# Altium PCB Main.PcbDoc
Units mil, origin at the board's own origin, x right, y up, seen from the top; angles counter-clockwise.
Board outline 6755.91 x 4448.82 mil, 2 copper layers (Top Layer, Bottom Layer); 132 components, 92 nets, 548 pads, 40 vias.
Unrouted connection lines stored in the file: 23.
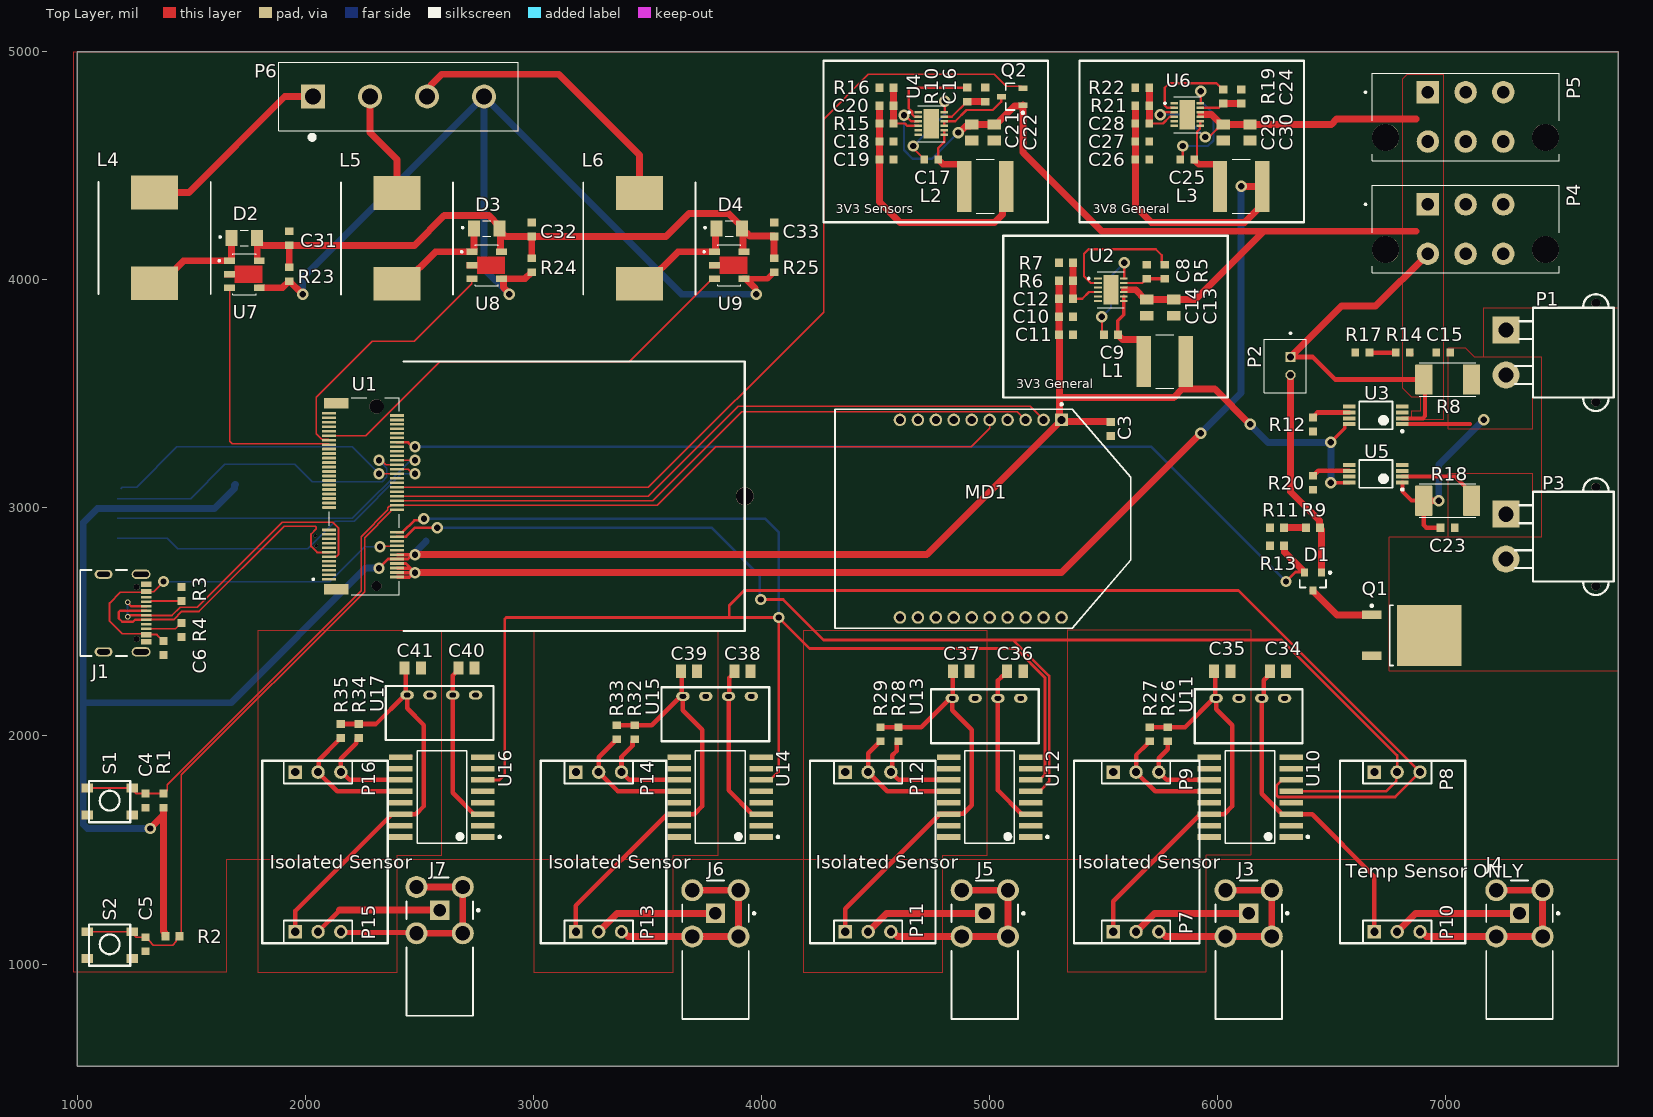
[diagram p0: Top Layer view]
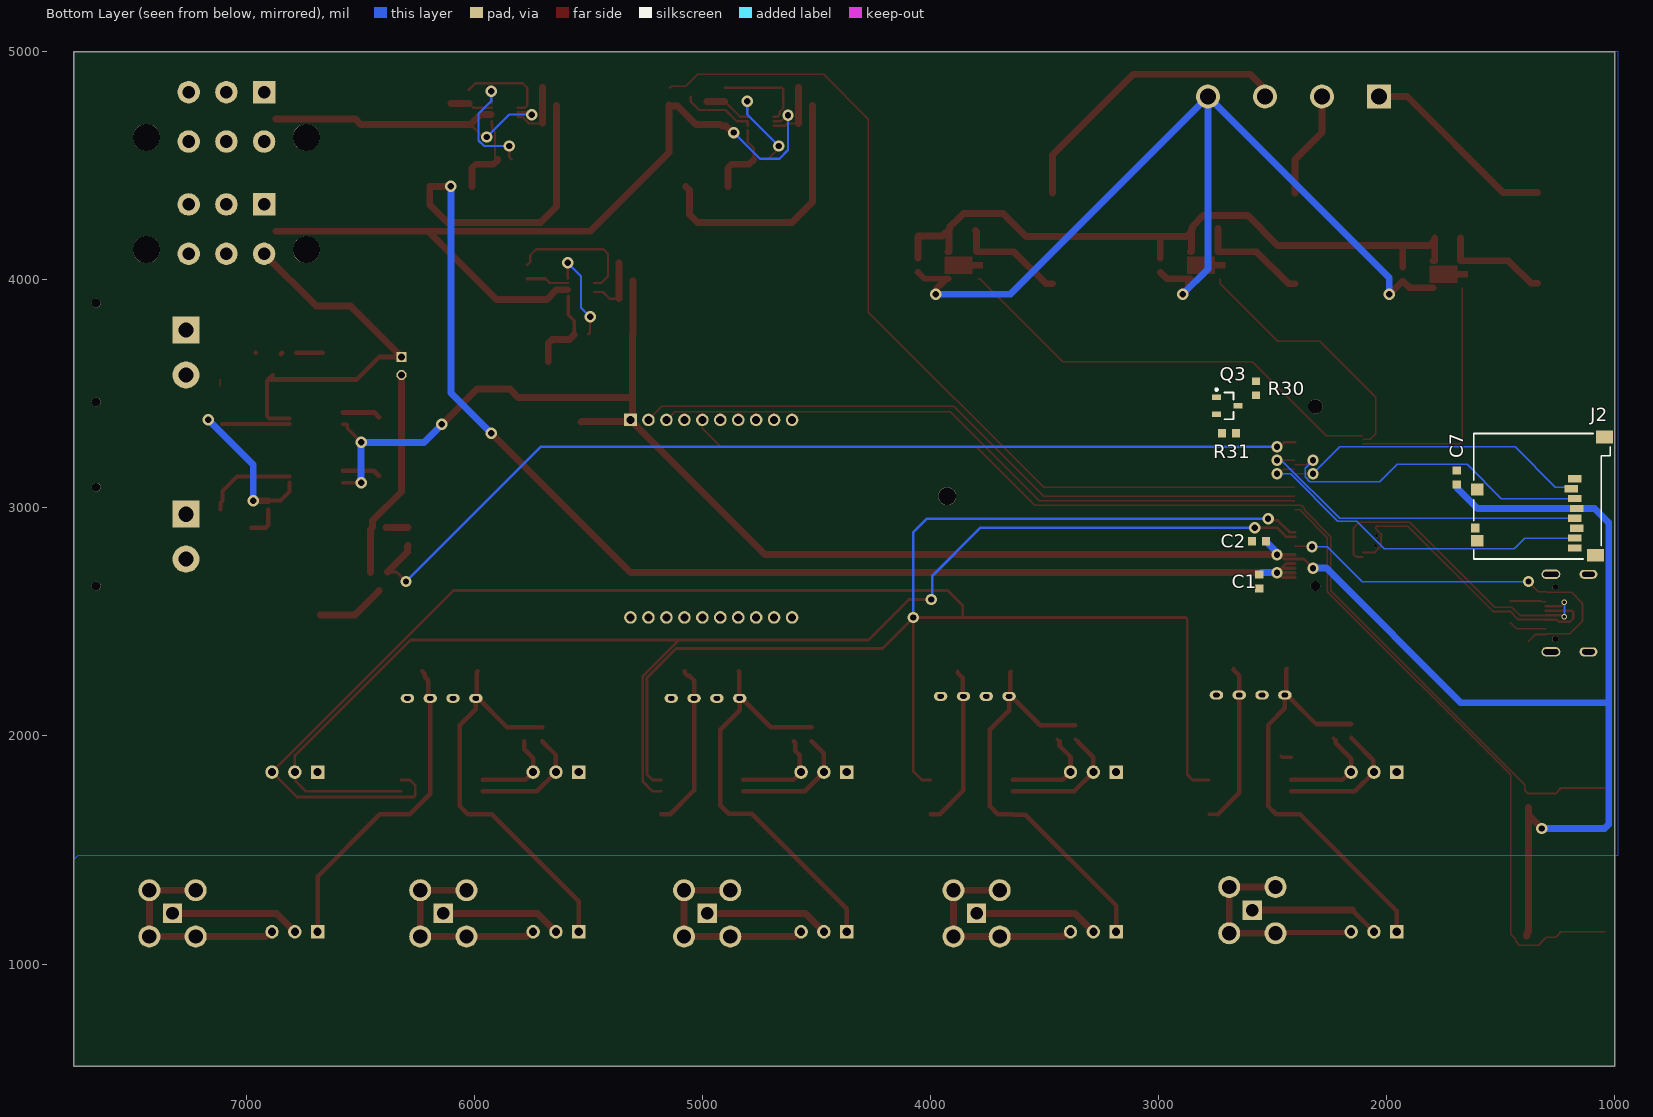
[diagram p1: Bottom Layer view, seen from below]

## Layer stack, top to bottom
Top Solder: solder mask 0.4, Solder Resist, Dk 3.5
Top Layer: signal copper 1.4
Dielectric 1: dielectric 12.6, FR-4, Dk 4.8
Bottom Layer: signal copper 1.4
Bottom Solder: solder mask 0.4, Solder Resist, Dk 3.5

## Board outline
1000,551.18 7755.91,551.18 7755.91,5000 1000,5000

## Design rules (kind name [scope] priority, off if disabled: settings)
Clearance "Clearance, Clarence" [All] p1: gap=6 ignorepadtopadclearanceinfootprint=TRUE except(20: Fill-Fill Fill-Poly Fill-Region Poly-Poly Poly-Region Region-Region)
Clearance [All] p2: gap=10 ignorepadtopadclearanceinfootprint=FALSE except(0: Arc-Hole Track-Hole SMDPad-Hole THPad-Hole Via-Hole Fill-Hole Poly-Hole Region-Hole Text-Hole)
DiffPairsRouting [All] p1: maxlimit=10 minlimit=10 mostfreqgap=10 toplayer_minwidth=6 toplayer_maxwidth=15 toplayer_prefwidth=15 bottomlayer_minwidth=6 bottomlayer_maxwidth=15 bottomlayer_prefwidth=15 maxuncoupledlength=500
PlaneClearance [All] p1: clearance=30
PolygonConnect "GND Copper" [InNet('GND')] p1: thpad.connectstyle=Relief thpad.reliefconductorwidth=10 thpad.reliefentries=4 thpad.polygonreliefangle="45 Angle" thpad.airgapwidth=6 smdpad.connectstyle=Direct smdpad.reliefconductorwidth=10 smdpad.reliefentries=4 smdpad.polygonreliefangle="45 Angle" smdpad.airgapwidth=6 via.connectstyle=Relief via.reliefconductorwidth=10 via.reliefentries=4 via.polygonreliefangle="45 Angle" via.airgapwidth=6
PolygonConnect [All] p2: connectstyle=Relief reliefconductorwidth=20 reliefentries=4 polygonreliefangle="45 Angle" airgapwidth=6
RoomDefinition LEDs [InComponentClass('LEDs')] p1: confinementstyle=ConfineIn formatcopy=TRUE lockcomponents=FALSE outline 4251.97,4973.23 1023.62,4973.23 1023.62,3763.54 4251.97,3763.54
RoomDefinition UserInputs [InComponentClass('UserInputs')] p2: confinementstyle=ConfineIn formatcopy=TRUE lockcomponents=FALSE outline 996.18,3488.19 996.18,968.5 1756.18,968.5 1756.18,3488.19
RoutingVias [All] p1: holewidth=28 width=50 viastyle="Through Hole" minholewidth=28 minwidth=50 maxholewidth=28 maxwidth=50
SolderMaskExpansion [All] p1: expansion=4 istentingtop=FALSE
Width [All] p1: maxlimit=30 minlimit=6 preferedwidth=15 minimp=50.000000 maximp=50.000000 favimp=50.000000
Width Width_1 [All] p2: maxlimit=10 minlimit=10 preferedwidth=10
28 further rules are at their usual default settings.

## Classes and differential pairs
component class Sensors: C34 C35 C36 C37 C38 C39 C40 C41 J3 J4 J5 J6 J7 P7 P8 P9 P10 P11 P12 P13 P14 P15 P16 Q3 R26 R27 R28 R29 R30 R31 R32 R33 R34 R35 U10 U11 U12 U13 U14 U15 U16 U17
component class UserInputs: C4 C5 C6 C7 J1 J2 R1 R2 R3 R4 S1 S2
component class Power: C8 C9 C10 C11 C12 C13 C14 C15 C16 C17 C18 C19 C20 C21 C22 C23 C24 C25 C26 C27 C28 C29 C30 D1 L1 L2 L3 P1 P2 P3 P4 P5 Q1 Q2 R5 R6 R7 R8 R9 R10 R11 R12 R13 R14 R15 R16 R17 R18 R19 R20 R21 R22 U2 U3 U4 U5 U6
component class MainPCB: C1 C2 C3 MD1 U1
component class LEDs: C31 C32 C33 D2 D3 D4 L4 L5 L6 P6 R23 R24 R25 U7 U8 U9
differential pair MCU_USB_D: +MCU_USB_D_P -MCU_USB_D_N

## Components (designator, comment, footprint, x,y, rotation, side; value= is the part's Value field where it differs from the comment)
C1 "Capacitor" ANTC1608X90N 2559.06,2677.17 r90 bottom value="1uF, 6.3V"
C2 "Capacitor" ANTC1608X90N 2559.06,2854.33 r180 bottom value="1uF, 6.3V"
C3 "Capacitor" ANTC1608X90N 5531.5,3346.46 r90 top value="1uF, 6.3V"
C4 "Capacitor" ANTC1608X90N 1299.21,1716.54 r90 top value="0.1uF, 6V"
C5 "Capacitor" ANTC1608X90N 1299.21,1086.61 r90 top value="0.1uF, 6V"
C6 "Capacitor" ANTC1608X90N 1377.95,2385.83 r90 top value="1uF, 6.3V"
C7 "Capacitor" ANTC1608X90N 1692.91,3133.86 r270 bottom value="1uF, 6.3V"
C8 "Capacitor" ANTC1608X90N 5688.98,4035.43 r270 top value="1uF, 6.3V"
C9 "Capacitor" ANTC1608X90N 5531.5,3759.84 r180 top value="0.1uF, 6V"
C10 "Capacitor" ANTC1608X90N 5334.65,3838.58 r180 top value="47uF, 6.3V"
C11 "Capacitor" ANTC1608X90N 5334.65,3759.84 r180 top value="22uF, 6.3V"
C12 "Capacitor" ANTC1608X90N 5334.65,3917.32 r0 top value="4.7pF, 6.3V"
C13 "Capacitor" CAPC2012X145N 5807.09,3877.95 r90 top value="10uF, 50V"
C14 "Capacitor" CAPC2012X145N 5688.98,3877.95 r90 top value="10uF, 50V"
C15 "Capacitor" ANTC1608X90N 6988.19,3681.1 r180 top value="0.1uF, 6V"
C16 "Capacitor" ANTC1608X90N 4980.31,4811.81 r270 top value="1uF, 6.3V"
C17 "Capacitor" ANTC1608X90N 4744.09,4527.56 r180 top value="0.1uF, 6V"
C18 "Capacitor" ANTC1608X90N 4547.24,4606.3 r180 top value="47uF, 6.3V"
C19 "Capacitor" ANTC1608X90N 4547.24,4527.56 r180 top value="22uF, 6.3V"
C20 "Capacitor" ANTC1608X90N 4547.24,4763.78 r0 top value="4.7pF, 6.3V"
C21 "Capacitor" CAPC2012X145N 4921.26,4645.67 r90 top value="10uF, 50V"
C22 "Capacitor" CAPC2012X145N 5019.69,4645.67 r90 top value="10uF, 50V"
C23 "Capacitor" ANTC1608X90N 7007.87,2913.39 r0 top value="0.1uF, 6V"
C24 "Capacitor" ANTC1608X90N 6102.36,4803.15 r270 top value="1uF, 6.3V"
C25 "Capacitor" ANTC1608X90N 5866.14,4527.56 r180 top value="0.1uF, 6V"
C26 "Capacitor" ANTC1608X90N 5669.29,4527.56 r180 top value="47uF, 6.3V"
C27 "Capacitor" ANTC1608X90N 5669.29,4606.3 r180 top value="22uF, 6.3V"
C28 "Capacitor" ANTC1608X90N 5669.29,4685.04 r0 top value="4.7pF, 6.3V"
C29 "Capacitor" CAPC2012X145N 6023.62,4645.67 r90 top value="10uF, 50V"
C30 "Capacitor" CAPC2012X145N 6141.74,4645.67 r90 top value="10uF, 50V"
C31 "Capacitor" ANTC1608X90N 1929.13,4181.89 r270 top value="4.7uF, 25V"
C32 "Capacitor" ANTC1608X90N 2992.13,4221.26 r270 top value="4.7uF, 25V"
C33 "Capacitor" ANTC1608X90N 4055.12,4221.26 r270 top value="4.7uF, 25V"
C34 "Capacitor" CAPC2012X145N 6263.78,2283.46 r0 top value="10uF, 50V"
C35 "Capacitor" CAPC2012X145N 6019.69,2283.46 r180 top value="10uF, 50V"
C36 "Capacitor" CAPC2012X145N 5111.81,2283.46 r0 top value="10uF, 50V"
C37 "Capacitor" CAPC2012X145N 4875.59,2283.46 r180 top value="10uF, 50V"
C38 "Capacitor" CAPC2012X145N 3915.75,2283.46 r0 top value="10uF, 50V"
C39 "Capacitor" CAPC2012X145N 3681.1,2283.46 r180 top value="10uF, 50V"
C40 "Capacitor" CAPC2012X145N 2706.57,2297.52 r0 top value="10uF, 50V"
C41 "Capacitor" CAPC2012X145N 2470.35,2297.52 r180 top value="10uF, 50V"
D1 "BAV23CLT1G" ONSC-SOT-23-3-318-08_V 6417.32,2677.17 r270 top
D2 ">2A peak, >400mA cont." DIO_SS26FL 1732.28,4183.86 r0 top
D3 ">2A peak, >400mA cont." DIO_SS26FL 2795.28,4225.2 r0 top
D4 ">2A peak, >400mA cont." DIO_SS26FL 3858.27,4225.2 r0 top
J1 "USB4105-GF-A" GCT_USB4105-GF-A 1114.96,2538.98 r270 top
J2 "uSD  SPI Mode" GCT_MEM2051-00-195-00-A 1318.9,3051.18 r90 bottom
J3 "PCB.SMAFRA.HT" FP-PCB_SMAFRA_HT-MFG 6135.43,1062.99 r180 top
J4 "PCB.SMAFRA.HT" FP-PCB_SMAFRA_HT-MFG 7322.83,1062.99 r180 top
J5 "PCB.SMAFRA.HT" FP-PCB_SMAFRA_HT-MFG 4978.74,1062.99 r180 top
J6 "PCB.SMAFRA.HT" FP-PCB_SMAFRA_HT-MFG 3797.64,1062.99 r180 top
J7 "PCB.SMAFRA.HT" FP-PCB_SMAFRA_HT-MFG 2588.46,1077.05 r180 top
L1 "Inductor" IND_NR6028T4R7M 5767.72,3641.73 r0 top value="4.7uH, >3A"
L2 "Inductor" IND_NR6028T4R7M 4980.31,4409.45 r0 top value="4.7uH, >3A"
L3 "Inductor" IND_NR6028T4R7M 6102.36,4409.45 r0 top value="4.7uH, >3A"
L4 "Inductor" INDPM125125X800N 1338.58,4183.86 r90 top value="100uH, >2A"
L5 "Inductor" INDPM125125X800N 2401.57,4181.89 r90 top value="100uH, >2A"
L6 "Inductor" INDPM125125X800N 3464.57,4181.89 r90 top value="100uH, >2A"
MD1 "XBP9B-DMUTB002" FP-XBP9B-DMUTB002-MFG 4970.47,2952.76 r270 top
P1 "Board Pwr, XT30" XT30_Horizontal 7559.06,3681.1 r270 top
P2 "Pwr Button" TE_6-440054-2 6318.9,3661.69 r270 top
P3 "Solar Panel Converter" XT30_Horizontal 7559.06,2874.02 r270 top
P4 "Motor 1" TE_1586039-6 6921.26,4330.71 r0 top
P5 "Motor 2" TE_1586039-6 6921.26,4822.83 r0 top
P6 "LED Header" TE_350761-4 2033.46,4803.15 r90 top
P7 "Sensor Probe Side" HDR1X3 5541.73,1141.73 r0 top
P8 "Sensor MCU Side" HDR1X3 6686.61,1841.73 r0 top
P9 "Sensor MCU Side" HDR1X3 5541.73,1841.73 r0 top
P10 "Sensor Probe Side" HDR1X3 6686.61,1141.73 r0 top
P11 "Sensor Probe Side" HDR1X3 4366.93,1141.73 r0 top
P12 "Sensor MCU Side" HDR1X3 4366.93,1841.73 r0 top
P13 "Sensor Probe Side" HDR1X3 3185.83,1141.73 r0 top
P14 "Sensor MCU Side" HDR1X3 3185.83,1841.73 r0 top
P15 "Sensor Probe Side" HDR1X3 1955.39,1141.73 r0 top
P16 "Sensor MCU Side" HDR1X3 1955.39,1841.73 r0 top
Q1 "FDD6670A" DPAK 6850.39,2440.94 r0 top
Q2 "YJL3400A" SOT23-3 5098.43,4803.15 r180 top
Q3 "YJL3400A" SOT23-3 2698.43,3447.47 r180 bottom
R1 "Resistor" ANTC1608X90N 1377.95,1716.54 r270 top value=1k
R2 "Resistor" ANTC1608X90N 1417.32,1122.05 r180 top value=1k
R3 "Resistor" ANTC1608X90N 1456.69,2622.05 r270 top value=5.1k
R4 "Resistor" ANTC1608X90N 1456.69,2464.57 r90 top value=5.1k
R5 "Resistor" ANTC1608X90N 5767.72,4035.43 r270 top value=50k
R6 "Resistor" ANTC1608X90N 5334.65,3996.06 r0 top value=301k
R7 "Resistor" ANTC1608X90N 5334.65,4074.8 r0 top value=96.3k
R8 "Resistor" RESC6331X70N 7007.87,3562.99 r180 top value=1m
R9 "Resistor" ANTC1608X90N 6417.32,2913.39 r0 top value=100k
R10 "Resistor" ANTC1608X90N 4901.58,4811.81 r270 top value=50k
R11 "Resistor" ANTC1608X90N 6259.84,2913.39 r0 top value=20k
R12 "Resistor" ANTC1608X90N 6417.32,3366.14 r90 top value=100k
R13 "Resistor" ANTC1608X90N 6259.84,2834.65 r0 top value=10k
R14 "Resistor" ANTC1608X90N 6811.02,3681.1 r0 top value=100k
R15 "Resistor" ANTC1608X90N 4547.24,4685.04 r0 top value=301k
R16 "Resistor" ANTC1608X90N 4547.24,4842.52 r0 top value=96.3k
R17 "Resistor" ANTC1608X90N 6633.86,3681.1 r0 top value=20k
R18 "Resistor" RESC6331X70N 7007.87,3031.5 r180 top value=10m
R19 "Resistor" ANTC1608X90N 6023.62,4803.15 r270 top value=50k
R20 "Resistor" ANTC1608X90N 6417.32,3110.24 r90 top value=20k
R21 "Resistor" ANTC1608X90N 5669.29,4763.78 r0 top value=301k
R22 "Resistor" ANTC1608X90N 5669.29,4842.52 r0 top value=80.3k
R23 "Resistor" ANTC1608X90N 1929.13,4024.41 r270 top value="30m, >0.1W"
R24 "Resistor" ANTC1608X90N 2992.13,4063.78 r270 top value="30m, >0.1W"
R25 "Resistor" ANTC1608X90N 4055.12,4063.78 r270 top value="30m, >0.1W"
R26 "Resistor" ANTC1608X90N 5781.1,2007.87 r90 top value=10k
R27 "Resistor" ANTC1608X90N 5702.36,2007.87 r90 top value=10k
R28 "Resistor" ANTC1608X90N 4600,2007.87 r90 top value=10k
R29 "Resistor" ANTC1608X90N 4521.26,2007.87 r90 top value=10k
R30 "Resistor" ANTC1608X90N 2572.44,3524.24 r90 bottom value=200k
R31 "Resistor" ANTC1608X90N 2690.55,3327.39 r0 bottom value=200k
R32 "Resistor" ANTC1608X90N 3443.31,2016.54 r90 top value=10k
R33 "Resistor" ANTC1608X90N 3364.57,2016.54 r90 top value=10k
R34 "Resistor" ANTC1608X90N 2234.13,2021.93 r90 top value=10k
R35 "Resistor" ANTC1608X90N 2155.39,2021.93 r90 top value=10k
S1 "Switch Normally Opened" TL3313AF250QG 1141.73,1716.54 r180 top
S2 "Switch Normally Opened" TL3313AF250QG 1141.73,1086.61 r180 top
U1 "B402" "B402 Full" 2312.01,3051.18 r90 top
U2 "ISL85003AFRZ" SON50P300X300X100-13N(270X200) 5531.5,3956.69 r0 top
U3 "INA139" INA139-Q1 6692.91,3405.51 r180 top
U4 "ISL85003AFRZ" SON50P300X300X100-13N(270X200) 4744.09,4685.04 r0 top
U5 "INA139" INA139-Q1 6692.91,3149.61 r180 top
U6 "ISL85003AFRZ" SON50P300X300X100-13N(270X200) 5866.14,4724.41 r0 top
U7 "AL8861Y-13" CONV_AL8861Y-13 1732.28,4024.41 r0 top
U8 "AL8861Y-13" CONV_AL8861Y-13 2795.28,4063.78 r0 top
U9 "AL8861Y-13" CONV_AL8861Y-13 3858.27,4063.78 r0 top
U10 "ISO1640QDWRQ1" DW0016A-IPC_A 6141.73,1732.28 r180 top
U11 "B0303S-1WR3" B0303S-1WR3 6135.43,2086.61 r180 top
U12 "ISO1640QDWRQ1" DW0016A-IPC_A 5000,1732.28 r180 top
U13 "B0303S-1WR3" B0303S-1WR3 4978.74,2086.61 r180 top
U14 "ISO1640QDWRQ1" DW0016A-IPC_A 3818.9,1732.28 r180 top
U15 "B0303S-1WR3" B0303S-1WR3 3797.64,2095.28 r180 top
U16 "ISO1640QDWRQ1" DW0016A-IPC_A 2598.43,1732.28 r180 top
U17 "B0303S-1WR3" B0303S-1WR3 2588.46,2100.67 r180 top

## Footprints (in the part's own frame and the unit in brackets; to place one, negate y for a bottom-side part, rotate by r counter-clockwise, add the part's x,y. Pads: shape width x height; smd on the part's side, far side on the other; paste and mask are expansions set on the pad)
ANTC1608X90N [mm]
  rect 0.87x0.93 smd: 1(-0.78,0) 2(0.78,0)
B0303S-1WR3 [mm]
  oval 1.5x1 hole 0.5 slot 0.7 at 0 deg: 1(-4,-2) 2(-1.46,-2) 3(1.08,-2) 4(3.62,-2)
  silkscreen extent -6,-3 6,3
"B402 Full" [mm]
  rrect15% 0.3x1.55 smd: 1(-9.25,5.275) 2(-9,-2.275) 3(-8.75,5.275) 4(-8.5,-2.275) 5(-8.25,5.275) 6(-8,-2.275) 7(-7.75,5.275) 8(-7.5,-2.275) 9(-7.25,5.275) 10(-7,-2.275) 11(-6.75,5.275) 12(-6.5,-2.275) 13(-6.25,5.275) 14(-6,-2.275) 15(-5.75,5.275) 16(-5.5,-2.275) 17(-5.25,5.275) 18(-5,-2.275) 19(-4.75,5.275) 20(-4.5,-2.275) 21(-4.25,5.275) 22(-4,-2.275) 23(-3.75,5.275) 32(-1.5,-2.275) 33(-1.25,5.275) 34(-1,-2.275) 35(-0.75,5.275) 36(-0.5,-2.275) 37(-0.25,5.275) 38(0,-2.275) 39(0.25,5.275) 40(0.5,-2.275) 41(0.75,5.275) 42(1,-2.275) 43(1.25,5.275) 44(1.5,-2.275) 45(1.75,5.275) 46(2,-2.275) 47(2.25,5.275) 48(2.5,-2.275) 49(2.75,5.275) 50(3,-2.275) 51(3.25,5.275) 52(3.5,-2.275) 53(3.75,5.275) 54(4,-2.275) 55(4.25,5.275) 56(4.5,-2.275) 57(4.75,5.275) 58(5,-2.275) 59(5.25,5.275) 60(5.5,-2.275) 61(5.75,5.275) 62(6,-2.275) 63(6.25,5.275) 64(6.5,-2.275) 65(6.75,5.275) 66(7,-2.275) 67(7.25,5.275) 68(7.5,-2.275) 69(7.75,5.275) 70(8,-2.275) 71(8.25,5.275) 72(8.5,-2.275) 73(8.75,5.275) 74(9,-2.275) 75(9.25,5.275)
  round 2 hole 2: Mech(0,-41)
  rrect15% 1.2x2.75 smd: S1(-10.35,4.5) S2(10.35,4.5)
  round 1.1 hole 1.1 unplated: ""(-10,0)
  round 1.6 hole 1.6 unplated: ""(10,0)
  silkscreen extent -15,-41 15,7.15
CAPC2012X145N [mm]
  rect 1.11x1.47 smd: 1(-0.9,0) 2(0.9,0)
CONV_AL8861Y-13 [mm]
  rect 1.2x0.68 smd: 1(-1.65,1.5) 3(-1.65,-1.5) 4(1.65,-1.5) 5(1.65,1.5)
  rect 1.2x0.68 smd paste-2 mask+0: 2(-1.65,0)
  Top Layer region: 2,-0.965 -1.05,-0.965 -1.05,-0.34 -2.25,-0.34 -2.25,0.34 -1.05,0.34 -1.05,0.965 2,0.965
  silkscreen extent -2.9,-2.3 1.3,2.3
DIO_SS26FL [mm]
  rect 1.34x1.8 smd: 1(-1.43,0) 2(1.43,0)
  silkscreen extent -2.8,-0.86 0.44,0.86
DPAK [mm] "D-PAK, 3-Pads, Body 6.21x6.73mm (max), IPC Medium Density"
  rect 7.2x6.8 smd: 1(1.95,0)
  rect 2.2x0.95 smd: 2(-4.45,2.28) 3(-4.45,-2.28)
  silkscreen extent -4.57,-3.35 -2.05,3.43, body extent -2.45,-3.37 3.77,3.37, height 2.39
DW0016A-IPC_A [mil]
  rect 102.47x24.49 smd paste+0 mask+0: 1(-179.74,175) 2(-179.74,125) 3(-179.74,75) 4(-179.74,25) 5(-179.74,-25) 6(-179.74,-75) 7(-179.74,-125) 8(-179.74,-175) 9(179.74,-175) 10(179.74,-125) 11(179.74,-75) 12(179.74,-25) 13(179.74,25) 14(179.74,75) 15(179.74,125) 16(179.74,175)
  silkscreen extent -258,-203 109,203, body extent 0,0 10,10, height 10
FP-PCB_SMAFRA_HT-MFG [mm]
  rect 2.15x2.15 hole 1.4 paste-1000 mask+0: 1(0,-4.05)
  round 2.45 hole 1.6 paste-1000 mask+0: 2(-2.575,-1.475) 3(2.575,-1.475) 4(-2.575,-6.625) 5(2.575,-6.625)
  silkscreen extent -4.43,-7.7 3.7,7.7, body extent -3.9,-7.95 3.9,7.8, height 0.25
FP-XBP9B-DMUTB002-MFG [mm]
  rect 1.4x1.4 hole 0.9 paste-1000 mask+0: 1(-11,8.75)
  round 1.4 hole 0.9 paste-1000 mask+0: 2(-11,6.75) 3(-11,4.75) 4(-11,2.75) 5(-11,0.75) 6(-11,-1.25) 7(-11,-3.25) 8(-11,-5.25) 9(-11,-7.25) 10(-11,-9.25) 11(11,-9.25) 12(11,-7.25) 13(11,-5.25) 14(11,-3.25) 15(11,-1.25) 16(11,0.75) 17(11,2.75) 18(11,4.75) 19(11,6.75) 20(11,8.75)
  silkscreen extent -12.86,-16.47 12.19,16.47, body extent -12.29,-16.57 12.29,16.57, height 0.25
GCT_MEM2051-00-195-00-A [mm]
  rect 0.8x1.5 smd: 1(1.94,-3.66) 2(0.84,-3.26) 3(-0.26,-3.66) 4(-1.36,-3.86) 5(-2.46,-3.66) 6(-3.56,-3.86) 7(-4.66,-3.66) 8(-5.76,-3.66)
  rect 1x0.95 smd: 9(-3.56,7.425)
  rect 1.3x1.4 smd: P1(-4.95,7.2) P2(0.75,7.2)
  rect 1.4x1.9 smd: P3(6.6,-6.95) P4(-6.55,-5.95)
  silkscreen extent -7,-7.6 7,7.6
GCT_USB4105-GF-A [mm]
  rect 0.6x1.15 smd: A1_B12(-3.2,4.755) A4_B9(-2.4,4.755) B1_A12(3.2,4.755) B4_A9(2.4,4.755)
  rect 0.3x1.15 smd: A5(-1.25,4.755) A6(-0.25,4.755) A7(0.25,4.755) A8(1.25,4.755) B5(1.75,4.755) B6(0.75,4.755) B7(-0.75,4.755) B8(-1.75,4.755)
  oval 1.05x2.1 hole 0.6 slot 1.7 at 90 deg: S1(-4.32,4.18) S4(4.32,4.18)
  oval 1x2 hole 0.6 slot 1.4 at 90 deg: S2(-4.32,0) S3(4.32,0)
  round 0.65 hole 0.65 unplated: ""(-2.89,3.68) ""(2.89,3.68)
  silkscreen extent -4.79,-2.6 4.79,2.65
HDR1X3 [mm] "Connector; Header; 3 Position"
  rect 1.5x1.5 hole 0.9: 1(0,0)
  round 1.5 hole 0.9: 2(2.54,0) 3(5.08,0)
  silkscreen extent -1.27,-1.27 6.35,1.27
INA139-Q1 [mm] "TSOP, 8-Leads, Body 3.00x4.40mm, Pitch 0.65mm, IPC Medium Density"
  rect 1.4x0.45 smd: 1(-2.95,0.975) 2(-2.95,0.325) 3(-2.95,-0.325) 4(-2.95,-0.975) 5(2.95,-0.975) 6(2.95,-0.325) 7(2.95,0.325) 8(2.95,0.975)
  silkscreen extent -3.08,-1.55 1.85,1.87, body extent -2.25,-1.55 2.25,1.55, height 0.25
IND_NR6028T4R7M [mm]
  rect 1.6x5.7 smd: 1(-2.35,0) 2(2.35,0)
  silkscreen extent -1,-3 1,3
INDPM125125X800N [mm]
  rect 3.75x5.2 smd: 1(-5.05,0) 2(5.05,0)
  silkscreen extent -6.25,-6.25 6.25,6.25
ONSC-SOT-23-3-318-08_V [mm] "SOT23, 3-Leads, Body 2.92x1.3mm, Pitch 0.95mm"
  rect 0.9x0.8 smd: 1(-1,0.95) 2(-1,-0.95) 3(1,0)
  silkscreen extent -1.12,-1.46 0.65,2.03, body extent -0.65,-1.46 0.65,1.46, height 1.11
RESC6331X70N [mm]
  rrect7% 1.9x3.37 smd: 1(-2.66,0) 2(2.66,0)
  silkscreen extent -3.15,-1.87 3.15,1.86
SON50P300X300X100-13N(270X200) [mm]
  rrect25% 0.84x0.26 smd: 1(-1.435,1.25) 2(-1.435,0.75) 3(-1.435,0.25) 4(-1.435,-0.25) 5(-1.435,-0.75) 6(-1.435,-1.25) 7(1.435,-1.25) 8(1.435,-0.75) 9(1.435,-0.25) 10(1.435,0.25) 11(1.435,0.75) 12(1.435,1.25)
  rect 1.7x3.3 smd paste-3: 13(0,0)
  silkscreen extent -2.57,-2 1.5,2
SOT23-3 [mm] "SOT23, 3-Leads, Body 2.92x2.45mm, Pitch 0.95mm, IPC Medium Density"
  rect 1x0.6 smd: 1(-1.2,0.95) 2(-1.2,-0.95) 3(1.2,0)
  silkscreen extent -1.33,-1.5 0.7,1.92, body extent -0.7,-1.52 0.7,1.52, height 1.1
TE_6-440054-2 [mm]
  rect 1.15x1.15 hole 0.8: 1(0,0)
  round 1.15 hole 0.8: 2(2.007,0)
  silkscreen extent -2.75,-2.95 4.01,1.75
TE_350761-4 [mm]
  rect 2.67x2.67 hole 1.78: 1(0,0)
  round 2.67 hole 1.78: 2(0,-6.35) 3(0,-12.7) 4(0,-19.05)
  silkscreen extent -4.73,-22.86 3.81,3.81
TE_1586039-6 [mm]
  rect 2.5x2.5 hole 1.4: 1(0,0)
  round 2.5 hole 1.4: 2(0,-5.5) 3(4.2,0) 4(4.2,-5.5) 5(8.4,0) 6(8.4,-5.5)
  round 3 hole 3 unplated: ""(-4.7,-5.04) ""(13.1,-5.04)
  silkscreen extent -7.05,-7.62 14.6,2.12
TL3313AF250QG [mm] "Switch"
  rect 1.3x1 smd: 1(-2.5,-1.4) 1(2.5,-1.4) 2(-2.5,1.6) 2(2.5,1.6)
  silkscreen extent -2.3,-2.2 2.3,2.4
XT30_Horizontal [mm]
  rect 3x3 hole 1.7: 1(-2.5,-7.5)
  round 3 hole 1.7: 2(2.5,-7.5)
  round 1 hole 1: MECH(-5.5,2.5) MECH(5.5,2.5)
  silkscreen extent -6.5,-6.5 6.5,4.5

## Part data
D1: library part CMP-1054-00102-1, "Dual High Voltage Common Cathode Switching Diodes, 3-Pin SOT-23, Pb-Free, Tape and Reel", Manufacturer="On Semiconductor", ComponentLink1Description="Manufacturer URL", ComponentLink1URL=http://www.onsemi.com/, ComponentLink2Description=Datasheet, ComponentLink2URL=http://www.onsemi.com/pub_link/Collateral/BAV23CLT1-D.PDF, ComponentLink3Description="Package Specification", ComponentLink3URL=http://www.onsemi.cn/pub_link/Collateral/318-08.PDF, Configuration="Common Cathode", DatasheetVersion="Rev. 2", IF Max (A)=0.4, Mounting Technology="Surface Mount", PackageDescription="3-Pin Small Outline Transistor, Body 2.92 x 1.3 mm, Pitch 0.95 mm", PackageReference=SOT-23-3-318-08, PackageVersion="Rev. AP, 11/2009", Packing="Tape and Reel", PartNumber=BAV23CLT1G, RoHS=TRUE, trr Max (ns)=150
D2 D3 D4: library part "Shottky Diode", "Shottky Diode", AF=1, BV=0, BV_MAX=1e99, CJO=0, CJP=0, CTA=0, CTP=0, EG=1.11, FC=0.5, FCS=0.5, FV_MAX=1e99, IBV=0.001, IKF=0, IKR=0, IS=1e-14, ISR=1e-14, JSW=0, JTUN=0, JTUNSW=0, KEG=1, KF=0, LEVEL=1, MJSW=0.33, N=1, NBV=1, NR=1, NS=1, NTUN=30, PHP=1, RS=0, SimulationGenericComponent=True, TCV=0, TLEV=0, TLEVC=0, TM1=0, TM2=0, TNOM=27, TPB=0, TPHP=0, TRS=0, TRS2=0, TT=0, TTT1=0, TTT2=0, VJ=1, XTI=3, XTITUN=3
J1: "USB-C (USB TYPE-C) USB 2.0 Receptacle Connector 24 (16+8 Dummy) Position Surface Mount, Right Angle; Through Hole", Package=None, Availability=Unavailable, MP=USB4105-GF-A, Price=None
J2: library part MEM2051-00-195-00-A, "9 (8 + 1) Position Card Connector microSDâ„¢ Surface Mount, Right Angle Gold, 1.95mm profile, Normally open switch, Push push, Top mount", Package=None, Availability=Warning, Check_prices=https://www.snapeda.com/parts/MEM2051-00-195-00-A/Global%20Connector%20Technology/view-part/779220/?ref=eda, MF="Global Connector Technology", MP=MEM2051-00-195-00-A, Price=None, Purchase-URL=https://pricing.snapeda.com/search/part/MEM2051-00-195-00-A/?ref=eda, SnapEDA_Link=https://www.snapeda.com/parts/MEM2051-00-195-00-A/Global%20Connector%20Technology/view-part/779220/?ref=snap
J3 J4 J5 J6 J7: library part CMP-111093-000003-1, "CONN SMA JACK R/A 50OHM PCB", Case/Package=SMA, Dielectric Material=PTFE, Frequency=6GHz, Housing Color=Gold, Operating Frequency="0 to 6 GHz", Package Quantity=500, Voltage Rating=500V, Body Material=Brass, Body Plating=Gold, Center Contact Plating=Gold, Connector Type=SMA, Contact Material=Brass, Contact Plating=Gold, Fastening Type=Threaded, Impedance=50R, Max Frequency=6GHz, Mount="Through Hole", Number of Ports=1, Orientation="Right Angle", Packaging=Tray, Series=-, Termination=Solder
MD1: library part CMP-84319-000004-1, "RX TXRX MOD ISM < 1GHZ U.FL TH", Case/Package=Module, Current - Receiving=29mA, Current - Transmitting=215mA, Frequency=900MHz, Max Frequency=928MHz, Max Operating Temperature=85°C, Max Supply Voltage=3.6V, Min Frequency=902MHz, Min Operating Temperature=-40°C, Min Supply Voltage=2.4V, Output Power (dBm)=24dBm, Package Quantity=1, Data Rate=200Kbps, Interface=SPI, Memory Size=2KB, Number of Pins=20, Packaging=Bulk, Radiation Hardening=No, RAM Size=2KB, Sensitivity=-101dBm, Series=XBee-Pro™
P1 P2 P3: library part "Header 2", "Header, 2-Pin", LatestRevisionDate=17-Jul-2002, LatestRevisionNote="Re-released for DXP Platform.", Publisher="Altium Limited"
P4 P5: library part "Header 6", "Header, 6-Pin", LatestRevisionDate=17-Jul-2002, LatestRevisionNote="Re-released for DXP Platform.", Publisher="Altium Limited"
P6: library part "Header 4", "Header, 4-Pin", LatestRevisionDate=17-Jul-2002, LatestRevisionNote="Re-released for DXP Platform.", Publisher="Altium Limited"
P7 P8 P9 P10 P11 P12 P13 P14 P15 P16: library part "Header 3", "Header, 3-Pin", LatestRevisionDate=17-Jul-2002, LatestRevisionNote="Re-released for DXP Platform.", Publisher="Altium Limited"
Q1 Q2 Q3: library part MOSFET-N, "N-Channel MOSFET", LatestRevisionDate=17-Jul-2002, LatestRevisionNote="Re-released for DXP Platform.", PackageDescription="TO, Flat Index; 3 In-Line, Axial Leads; Body Dia. 4.6mm; Lead Dia. 0.5 mm (max)", PackageReference=E3, PackageVersion=1995/1996, Published=8-Jun-2000, Publisher="Altium Limited"
S1 S2: library part "SW NO", closed=0, Rclosed=1m, Ropen=1Meg, SimulationGenericComponent=True
U1: "Connector, Backplane, Housing, Receptacle, 67 Position, 2row", Package=None, Supplier Part Number 1="Particle B402", Availability=Unavailable, MP=2199230-4, Price=None, Supplier 1=Digi-Key
U2 U4 U6: "No Description Available", Mfr_Name="Renesas Electronics", Copyright="Copyright (C) 2022 Ultra Librarian. All rights reserved.", Digi-Key_Part_Number_1=ISL85003AFRZ-ND, Manufacturer_Part_Number=ISL85003AFRZ, RefDes=RefDes, Type=DEV
U3 U5: "Current Monitor Regulator High-Side SOT-23-5", Package="SOT-23-5 Texas Instruments", Availability=Unavailable, MF="Texas Instruments", MP=INA139, Price=None, SnapEDA_Link=https://www.snapeda.com/parts/INA139/Texas%20Instruments/view-part/560986/?ref=snap
U7 U8 U9: "LED Driver IC 1 Output DC DC Regulator Step-Down _Buck_ Analog, PWM Dimming 1.5A SOT-89-5", Package="SOT-89 Diodes Inc.", Availability=Unavailable, MF="Diodes Inc.", MP=AL8861Y-13, Price=None, SnapEDA_Link=https://www.snapeda.com/parts/AL8861Y-13/Diodes%20Inc./view-part/1241445/?ref=snap
U10 U12 U14 U16: "No Description Available", Mfr_Name="Texas Instruments", Copyright="Copyright (C) 2022 Ultra Librarian. All rights reserved.", Digi-Key_Part_Number_1=296-ISO1640QDWRQ1TR-ND, Digi-Key_Part_Number_2=296-ISO1640QDWRQ1CT-ND, Digi-Key_Part_Number_3=296-ISO1640QDWRQ1DKR-ND, Manufacturer_Part_Number=ISO1640QDWRQ1, RefDes=RefDes, Type=DEV
U11 U13 U15 U17: "3V3 Isolator"
C1 C2 C3 C4 C5 C6 C7 C8 C9 C10 C11 C12 C13 C14 C15 C16 C17 C18 C19 C20 C21 C22 C23 C24 C25 C26 C27 C28 C29 C30 C31 C32 C33 C34 C35 C36 C37 C38 C39 C40 C41 L1 L2 L3 L4 L5 L6: SimulationGenericComponent=True
R1 R2 R3 R4 R5 R6 R7 R8 R9 R10 R11 R12 R13 R14 R15 R16 R17 R18 R19 R20 R21 R22 R23 R24 R25 R26 R27 R28 R29 R30 R31 R32 R33 R34 R35: SimulationGenericComponent=True, TC1=0, TC2=0

## Via types
v1: diameter 50, hole 28, Top Layer to Bottom Layer, 36 vias
v2: diameter 15.75, hole 15.75, Top Layer to Bottom Layer, 2 vias
v3: diameter 23.62, hole 15.75, Top Layer to Bottom Layer, 2 vias

## Nets (pads, with @x,y where several pads share a name; then routed paths per layer and width w, separated by ;. In a path a pad name is that pad's centre, name@x,y a point inside that pad or via, vN(x,y) a via of type N, cw(c..) or ccw(c..) an arc to the next point about the centre after c; other vN are vias at no path point)
3V3: C2.2 C3.2 C7.2 C10.2 C11.2 C12.1 J2.4 L1.2 MD1.1 R1.2 R2.2 R6.1 R30.2 U1.10 U1.12 U3.8 U5.8 | length 10533.7
  Top Layer w6: R1.2 1386.61,1677.16 1386.61,1653.54
  Top Layer w10: v1@2469.49,2795.28 v1(2480.32,2795.28)
  Top Layer w12: v1(2322.83,2736.22) 2362.11,2775.5 2401.48,2775.5 U1.10 2449.81,2775.59 v1@2469.49,2795.28
  Top Layer w15: U1.12 v1(2480.32,2795.28) ; v1(6496.06,3110.24) 6496.55,3110.73 6576.28,3110.73 U5.8 ; v1(6496.06,3287.4) 6557.16,3348.5 6557.16,3365.77 6558.52,3367.13 U3.8@6575.79,3367.13
  Top Layer w30: v1(1318.9,1594.49) 1377.95,1653.54 ; R1.2 1377.95,1653.54 ; R2.2 1384.49,1124.17 1384.49,1136.39 1377.95,1142.93 1377.95,1653.54 ; v1(2480.32,2795.28) 4724.41,2795.28 MD1.1 ; R6.1 C12.1 C10.2 C11.2 5306.06,3757.72 5306.06,3484.25 ; C3.2 5529.37,3379.29 5321.49,3379.29 MD1.1 ; v1(6141.73,3366.14) 5986.97,3520.91 5843.74,3520.91 5807.09,3484.25 5306.06,3484.25 ; 5306.06,3484.25 5306.06,3394.72 MD1.1
  Bottom Layer w30: v1(1318.9,1594.49) 1043.82,1594.49 1026.24,1612.06 1026.24,2145.67 ; C7.2 1691.73,3103.15 1689.61,3101.02 1689.61,3085.1 1602.14,2997.64 J2.4 1166.18,2996.89 1087.44,2996.89 1026.24,2935.69 1026.24,2145.67 ; v1(2322.83,2736.22) 2263.78,2736.22 1673.23,2145.67 1026.24,2145.67 ; v1(2480.32,2795.28) 2484.14,2799.1 2484.14,2808.95 2528.35,2853.15 C2.2 ; v1(6141.73,3366.14) 6220.47,3287.4 v1(6496.06,3287.4) v1(6496.06,3110.24)
3V3_S: C18.2 C19.2 C20.1 C34.1 C36.1 C38.1 C40.1 L2.2 P10.1 R15.1 U10.3 U11.2 U12.3 U13.2 U14.3 U15.2 U16.3 U17.2 | length 4756.9
  Top Layer w15: C40.1@2671.14,2290.43 C40.1 ; U16.3@2739.18,1657.28 U16.3 ; U15.2 U15.2@3858.38,2177.28 ; C38.1@3880.31,2276.38 C38.1
  Top Layer w20: C40.1@2671.14,2290.43 2645.94,2265.24 U17.2 2645.94,1750.52 U16.3@2739.18,1657.28 ; U15.2 3855.12,1761.82 3959.65,1657.28 U14.3 ; U15.2@3858.38,2177.28 3858.38,2254.44 C38.1@3880.31,2276.38 ; C36.1 5076.38,2276.38 5064.53,2264.53 5057.44,2264.53 5036.22,2243.31 U13.2 5036.22,1761.82 5140.75,1657.28 U12.3 ; C34.1 6216.5,2271.61 6216.5,2259.8 6200.79,2244.09 6200.79,2173.23 U11.2 6192.91,1746.86 6282.49,1657.28 U10.3 6413.58,1657.28 6686.61,1384.25 P10.1
  Top Layer w30: C20.1 R15.1 C18.2 C19.2 4516.54,4341.73 4606.3,4251.97 5021.19,4251.97 5056.34,4287.12 5056.34,4392.95 L2.2
3V8: C1.2 C26.2 C27.2 C28.1 L3.2 R21.1 U1.2 U1.4 U1.6 U1.8 | length 6495.1
  Top Layer w12: U1.8 2440.94,2755.91 v1(2480.32,2716.54)
  Top Layer w15: U1.2 2454.59,2696.85 v1@2474.27,2716.54 ; U1.4 v1@2474.27,2716.54 ; U1.6 2454.59,2736.22 v1@2474.27,2716.54 ; v1@2474.27,2716.54 v1(2480.32,2716.54) v1@2474.27,2716.54
  Top Layer w30: v1(2480.32,2716.54) 5314.96,2716.54 v1(5925.2,3326.77) ; R21.1 C28.1 C27.2 C26.2 5638.58,4322.05 5708.66,4251.97 6118.11,4251.97 6194.88,4328.74 L3.2 v1(6102.36,4409.45)
  Bottom Layer w30: v1(2480.32,2716.54) C1.2@2548.03,2716.54 ; v1(5925.2,3326.77) 6102.36,3503.94 v1(6102.36,4409.45)
A1: R9.1 R11.2 U1.33 | length 96.1
  Top Layer w30: R11.2 R9.1
A2: R20.2 U1.35 U5.6 | length 168.3
  Top Layer w20: R20.2 6418.5,3140.94 6439.96,3162.4 U5.6
A3: R12.2 U1.37 U3.6 | length 169.9
  Top Layer w20: R12.2 6418.5,3396.85 6425.63,3403.98 6425.63,3406.59 6437.34,3418.31 U3.6
A4: P4.3 U1.41
A5: P5.3 U1.43
A6: R14.1 R17.2 U1.45 | length 115.7
  Top Layer w20: R17.2 R14.1
Battery_GND: P1.1 P3.2 Q1.1
Battery_VCC: C15.1 C23.1 P1.2 R8.1 R18.2 U3.1 U5.1 | length 1122.9
  Top Layer w6: R8.1@7112.6,3534.05 R8.1
  Top Layer w17.5: U5.1 6809.06,3072.83 6849.75,3032.14 6902.51,3032.14 R18.2 ; U3.1 7106.3,3367.13
  Top Layer w20: R18.2@6903.15,2992.13 6903.15,2925.1 6914.87,2913.39 C23.1
  Top Layer w30: R18.2 v1(6968.5,3031.5)
  Bottom Layer w30: v1(6968.5,3031.5) 6968.5,3188.98 v1(7165.35,3385.83)
CS: J2.2 U1.48 | length 1335.9
  Top Layer w6: v1(2322.83,3149.61) U1.48
  Bottom Layer w6: J2.2 1196.85,3090.55 1259.84,3090.55 1437.01,3267.72 2204.72,3267.72 v1(2322.83,3149.61)
D2: Q2.2 U1.42 | length 4015.4
  Top Layer w6: U1.42 3503.94,3090.55 4271.65,3858.27 4271.65,4704.72 4468.5,4901.57 5019.69,4901.57 5071.9,4849.36 5136.86,4849.36 Q2.2
D3: U1.40
D22: D1.2 R13.2 U1.62 | length 4401.4
  Top Layer w12: U1.62 2450.35,3287.4 2470.03,3267.72 v1(2480.32,3267.72) ; v1(6299.21,2677.17) 6340.55,2718.5 D1.2@6379.92,2718.5
  Top Layer w30: R13.2 6292.68,2832.52 6292.68,2805.75 D1.2@6379.92,2718.5
  Bottom Layer w12: v1(2480.32,3267.72) 5708.66,3267.72 v1(6299.21,2677.17)
D23: Q3.1 R30.1 U1.64
GND: C1.1 C2.1 C3.1 C4.1 C5.1 C6.1 C7.1 C8.1 C10.1 C11.1 C13.1 C14.1 C16.1 C18.1 C19.1 C21.1 C22.1 C24.1 C26.1 C27.1 C29.1 C30.1 C31.1 C32.1 C33.1 C34.2 C36.2 C38.2 C40.2 J1.A1_B12 J1.B1_A12 J1.S1 J1.S2 J1.S3 J1.S4 J2.6 MD1.10 MD1.14 P4.5 P4.6 P5.5 P5.6 P8.1 Q1.3 Q3.3 R3.1 R4.1 R7.1 R11.1 R12.1 R13.1 R16.1 R17.1 R20.1 R22.1 R31.1 S1.2 S2.2 U1.1 U1.3 U1.5 U1.7 U1.9 U1.15 U1.21 U1.39 U1.49 U1.56 U1.S1 U1.S2 U2.1 U2.5 U2.6 U2.13 U3.4 U4.1 U4.5 U4.6 U4.13 U5.4 U6.1 U6.5 U6.6 U6.13 U7.2 U8.2 U9.2 U10.1 U10.7 U11.1 U12.1 U12.7 U13.1 U14.1 U14.7 U15.1 U16.1 U16.7 U17.1
  other v2: 2047.24,2834.65 2043.07,2878.19
ISO_GND_1: C35.1 P9.1 U10.9 U10.16 U11.3
ISO_GND_2: C37.1 P12.1 U12.9 U12.16 U13.3
ISO_GND_3: C39.1 P14.1 U14.9 U14.16 U15.3
ISO_GND_4: C41.1 P16.1 U16.9 U16.16 U17.3 | length 55.5
  Top Layer w15: U16.9 2457.67,1907.28 U16.9@2462.42,1912.03 ; U17.3@2536.1,2179.41 U17.3
ISO_SCL_1: P9.3 R26.1 U10.11 | length 386.3
  Top Layer w20: R26.1 5780.34,1976.4 5780.34,1941.76 5741.73,1903.15 P9.3 5776.18,1807.28 U10.11
ISO_SCL_2: P12.3 R28.1 U12.11 | length 417.4
  Top Layer w20: R28.1 4598.82,1977.17 4591.69,1970.04 4591.69,1934.21 4573.55,1916.07 4573.55,1848.36 P12.3 4601.38,1807.28 U12.11
ISO_SCL_3: P14.3 R32.1 U14.11 | length 435.5
  Top Layer w15: R32.1@3434.13,1976.65 R32.1
  Top Layer w20: R32.1@3434.13,1976.65 3434.13,1957.75 3385.83,1909.45 P14.3 3420.28,1807.28 U14.11
ISO_SCL_4: P16.3 R34.1 U16.11 | length 460.4
  Top Layer w15: P16.3 P16.3@2160.08,1841.73 ; R34.1@2223.33,1981.59 2232.95,1991.22 R34.1
  Top Layer w20: P16.3 2155.39,1899.49 2223.33,1967.42 R34.1@2223.33,1981.59 ; P16.3@2160.08,1841.73 2194.52,1807.28 U16.11
ISO_SDA_1: P9.2 R27.1 U10.12 | length 516.5
  Top Layer w20: R27.1 5701.18,1977.17 5694.05,1970.04 5694.05,1968.86 5641.73,1916.54 P9.2 5726.18,1757.28 U10.12
ISO_SDA_2: P12.2 R29.1 U12.12 | length 546.9
  Top Layer w20: R29.1 4520.08,1977.17 4466.93,1924.02 P12.2 4551.38,1757.28 U12.12
ISO_SDA_3: P14.2 R33.1 U14.12 | length 565.7
  Top Layer w15: R33.1@3353.76,1976.2 3363.38,1985.83 R33.1
  Top Layer w20: R33.1@3353.76,1976.2 3353.76,1975.02 3285.83,1907.09 P14.2 3370.28,1757.28 U14.12
ISO_SDA_4: P16.2 R35.1 U16.12 | length 589.9
  Top Layer w15: P16.2 P16.2@2057.93,1844.27 ; R35.1@2144.59,1980.41 R35.1@2144.59,1981.59 ; R35.1@2154.21,1991.22 R35.1
  Top Layer w20: P16.2 2139.84,1757.28 U16.12 ; P16.2@2057.93,1844.27 2057.93,1893.76 R35.1@2144.59,1980.41 ; R35.1@2144.59,1981.59 R35.1@2154.21,1991.22
ISO_VCC_1: C35.2 P7.1 R26.2 R27.2 U10.14 U11.4 | length 1794.5
  Top Layer w20: P7.1 5541.73,1276.02 5923,1657.28 U10.14 5962.26,1657.55 6027.63,1657.55 6062.99,1692.91 6062.99,2047.24 5992.91,2117.32 U11.4 ; R27.2 R26.2 5856.3,2038.58 5983.07,2165.35 U11.4 ; C35.2 5988.58,2279.13 5988.58,2169.68 U11.4
ISO_VCC_2: C37.2 P11.1 R28.2 R29.2 U12.14 U13.4 | length 1834.8
  Top Layer w20: P11.1 4366.93,1242.95 4783.23,1659.24 4884.2,1659.24 4921.26,1696.3 4921.26,2027.56 4836.22,2112.6 U13.4 ; R29.2 R28.2 4699.61,2038.58 4826.38,2165.35 U13.4 ; C37.2 4838.19,2281.49 4838.19,2167.32 U13.4
ISO_VCC_3: C39.2 P13.1 R32.2 R33.2 U14.14 U15.4 | length 1822.7
  Top Layer w15: C39.2 C39.2@3650.39,2278.74 ; U15.4@3650.39,2178.74 U15.4
  Top Layer w20: P13.1 3185.83,1256.69 3584.17,1655.04 3636.91,1655.04 3639.42,1657.55 3704.8,1657.55 3740.16,1692.91 3740.16,2027.56 3655.12,2112.6 U15.4 3645.28,2174.02 3518.5,2047.24 R32.2 R33.2 ; U15.4@3650.39,2178.74 C39.2@3650.39,2278.74
ISO_VCC_4: C41.2 P15.1 R34.2 R35.2 U16.14 U17.4 | length 1819
  Top Layer w15: C41.2 C41.2@2440.43,2292.01 ; U17.4@2440.43,2184.92 U17.4
  Top Layer w20: P15.1 1955.39,1232.99 2379.69,1657.28 2484.06,1657.28 2519.68,1692.91 2519.68,2047.24 2445.94,2120.99 U17.4 ; R35.2 R34.2 2309.33,2052.64 U17.4@2436.1,2179.41 ; U17.4@2440.43,2184.92 C41.2@2440.43,2292.01
LED_Anode: P6.4 R23.2 R24.2 R25.2 U7.4 U8.4 U9.4 | length 4338
  Top Layer w25: U9.4@3930.24,4004.72 4025.59,4004.72 R25.2@4053.94,4033.07
  Top Layer w30: U7.4 1899.61,3965.35 1927.95,3993.7 R23.2 1930.32,3993.7 1987.01,3937.01 v1(1988.19,3937.01) ; U8.4 U8.4@2867.24,4004.72 ; v1(2893.7,3937.01) 2893.7,3942.42 2868.86,3967.26 2868.86,4003.11 U8.4@2867.24,4004.72 ; R24.2 2990.94,4033.07 2962.6,4004.72 U8.4@2867.24,4004.72 ; U9.4 3930.24,4004.72 3972.55,3962.41 3972.55,3940.83 v1(3976.38,3937.01) ; R25.2@4053.94,4033.07 R25.2
  Bottom Layer w30: v1(1988.19,3937.01) 1988.19,4007.88 P6.4 ; v1(2893.7,3937.01) 2783.46,4047.24 P6.4 ; v1(3976.38,3937.01) 3649.61,3937.01 P6.4
LED_B: L6.2 P6.3 | length 1304.8
  Top Layer w30: P6.3 2547.84,4817.52 2547.84,4850.99 2598.43,4901.57 3110.24,4901.57 3464.57,4547.24 L6.2
LED_G: L5.2 P6.2 | length 471.4
  Top Layer w30: P6.2 2283.46,4645.67 2401.57,4527.56 L5.2
LED_R: L4.2 P6.1 | length 869
  Top Layer w30: L4.2 1488.98,4382.68 1909.45,4803.15 P6.1
MCU_RGBB: U1.65 U9.3 | length 1973.9
  Top Layer w6: U1.65 2264.37,3316.93 2589.17,3641.73 3420.08,3641.73 3783.07,4004.72 U9.3
MCU_RGBG: U1.63 U8.3 | length 1139.4
  Top Layer w6: U1.63 2101.42,3300.15 2072.48,3300.15 2047.24,3325.39 2047.24,3484.25 2292.68,3729.69 2477.67,3729.69 2730.32,3982.34 U8.3
MCU_RGBR: U1.61 U7.3 | length 1115.6
  Top Layer w6: U7.3 1667.32,3293.31 1680.16,3280.47 2101.42,3280.47 U1.61
MCU_Rx: MD1.2 U1.38 | length 3022.2
  Top Layer w6: U1.38 3503.94,3051.18 3897.64,3444.88 5177.16,3444.88 MD1.2
MCU_Tx: MD1.3 U1.36 | length 2933
  Top Layer w6: U1.36 3522.15,3031.5 3913.04,3422.39 5120.92,3422.39 MD1.3
MCU_USB_D_N: J1.A6 J1.B6 U1.13 | length 1381.3
  Top Layer w8: J1.B6 1303.01,2510.29 1422.13,2510.29 1458.05,2546.21 1533.6,2546.21 1906.83,2919.45 2043.04,2919.45 2047.73,2914.76 2047.73,2908.14 2025.19,2885.6 2025.19,2831.42 2051.49,2805.12 U1.13
  Top Layer w10: J1.B6 1252.55,2509.45 1243.91,2500.81 1196.5,2500.81 1181.1,2516.21 1181.1,2542.96 1186.96,2548.82 J1.A6
MCU_USB_D_P: J1.A7 J1.B7 U1.11 | length 1408.1
  Top Layer w8: J1.A7 1303.01,2528.29 1414.68,2528.29 1450.6,2564.21 1526.14,2564.21 1899.38,2937.45 2120.47,2937.45 2144.84,2913.07 2144.84,2795.59 2136.59,2787.34 2130.84,2787.34 2128.94,2785.43 U1.11
  Top Layer w10: v3(1220.47,2585.63) 1220.47,2583.76 1235.73,2568.5 J1.B7 ; v3@1230.75,2529.13 J1.A7
  Bottom Layer w10: v3(1220.47,2523.62) v3(1220.47,2585.63)
MISO: J2.7 U1.50 | length 1547.3
  Top Layer w6: U1.50 2451.92,3169.29 2471.6,3149.61 v1(2480.32,3149.61)
  Bottom Layer w6: J2.7 1394.49,2867.72 1440.49,2821.71 2010.44,2821.71 2131.07,2942.33 2213.98,2942.33 2421.26,3149.61 v1(2480.32,3149.61)
Mode: C5.2 R2.1 S2.1 U1.32 | length 2734.2
  Top Layer w6: C5.2 1300.39,1117.32 1314.52,1103.2 1314.52,1102.02 1333.86,1082.68 1417.32,1082.68 1434.28,1099.64 1434.28,1108.3 1456.69,1130.71 1456.69,1830.71 2259.31,2633.32 2259.31,2869.54 2374.06,2984.3 2374.06,2989.22 2376.97,2992.13 U1.32
  Top Layer w8: S2.1@1043.31,1141.73 1240.16,1141.73 1240.16,1135.83 1258.66,1117.32 C5.2
MOSI: J2.3 U1.52 | length 1457.5
  Top Layer w6: v1(2322.83,3208.66) 2331.55,3208.66 2351.23,3188.98 U1.52
  Bottom Layer w6: J2.3 1496.72,3040.95 1646.47,3190.69 1954.15,3190.69 2029.24,3115.61 2336.92,3115.61 2356.83,3135.52 2356.83,3174.66 v1(2322.83,3208.66)
NetC8_2: C8.2 R5.2 U2.11 | length 187.4
  Top Layer w10: U2.11 5669.29,3986.22 C8.2@5687.8,4004.72
  Top Layer w15: C8.2@5687.8,4004.72 C8.2 R5.2
NetC9_1: C9.1 L1.1 U2.7 U2.8 | length 387.9
  Top Layer w15: C9.1 5562.2,3820.17 5587.99,3845.96 U2.7 U2.8
  Top Layer w30: C9.1 5562.2,3758.66 5581.93,3738.94 5658.7,3738.94 5675.2,3722.44 L1.1
NetC9_2: C9.2 U2.12 | length 430.7
  Top Layer w10: v1(5492.13,3838.58) 5492.13,3768.51 C9.2 ; U2.12 5590.43,4005.91 5590.55,4006.02 v1(5590.55,4074.8)
  Bottom Layer w10: v1(5492.13,3838.58) 5531.5,3877.95 5531.5,4015.75 v1(5590.55,4074.8)
NetC12_2: C12.2 R6.2 R7.2 U2.4 | length 279.4
  Top Layer w10: C12.2 5405.77,3917.32 5435.3,3946.85 U2.4
  Top Layer w30: C12.2 R6.2 R7.2
NetC16_2: C16.2 R10.2 U4.11 | length 207.3
  Top Layer w10: U4.11 4833.86,4714.57 4900.4,4781.1 R10.2
  Top Layer w30: R10.2 C16.2
NetC17_1: C17.1 L2.1 U4.7 U4.8 | length 348.5
  Top Layer w10: C17.1 4774.8,4577.95 4800.59,4603.74 U4.7 U4.8
  Top Layer w30: C17.1 4774.8,4526.38 4794.53,4506.65 4871.3,4506.65 4887.8,4490.16 L2.1
NetC17_2: C17.2 U4.12 | length 384.6
  Top Layer w10: v1(4665.35,4586.61) 4665.35,4576.77 4713.39,4528.74 C17.2 ; U4.12 4803.03,4734.25 4803.15,4734.37 v1(4803.15,4783.46)
  Bottom Layer w10: v1(4665.35,4586.61) 4803.15,4724.41 v1(4803.15,4783.46)
NetC20_2: C20.2 R15.2 R16.2 U4.4 | length 271.2
  Top Layer w10: R15.2 4628.21,4685.04 4638.05,4675.2 U4.4
  Top Layer w30: R15.2 C20.2 R16.2
NetC24_2: C24.2 R19.2 U6.11 | length 187.4
  Top Layer w10: U6.11 6003.94,4753.94 6022.44,4772.44 R19.2
  Top Layer w30: R19.2 C24.2
NetC25_1: C25.1 L3.1 U6.7 U6.8 | length 388.9
  Top Layer w10: C25.1 5908.88,4539.59 5908.88,4649.04 5920.78,4660.94 5920.78,4675.08 5920.9,4675.2 U6.7 U6.8
  Top Layer w30: C25.1 5896.85,4526.38 5916.58,4506.65 5993.35,4506.65 6009.84,4490.16 L3.1
NetC25_2: C25.2 U6.12 | length 501.4
  Top Layer w10: C25.2 5846.46,4538.58 v1(5846.46,4586.61) ; U6.12 5925.08,4773.62 5925.2,4773.74 v1(5925.2,4826.2)
  Bottom Layer w10: v1(5846.46,4586.61) 5956.42,4586.61 5980.88,4611.07 5980.88,4727.78 5925.2,4783.46 v1(5925.2,4826.2)
NetC28_2: C28.2 R21.2 R22.2 U6.4 | length 278.2
  Top Layer w10: C28.2 5759.57,4685.04 5788.98,4714.45 5809.53,4714.45 U6.4
  Top Layer w30: C28.2@5700,4686.22 R21.2 R22.2
NetD1_3: D1.3 Q1.2 | length 303.4
  Top Layer w30: D1.3 6417.32,2635.83 6522.44,2530.71 Q1.2
NetD2_1: D2.1 L4.1 U7.1 | length 477.6
  Top Layer w30: L4.1 1367.13,3985.04 1465.55,4083.46 U7.1 1674.33,4083.46 1675.98,4085.12 D2.1
NetD3_1: D3.1 L5.1 U8.1 | length 496.7
  Top Layer w30: L5.1 2430.12,3983.07 2569.88,4122.83 U8.1 2737.32,4122.83 2738.98,4124.49 D3.1
NetD4_1: D4.1 L6.1 U9.1 | length 485.1
  Top Layer w30: L6.1 3493.11,3983.07 3632.88,4122.83 U9.1 3796.02,4122.83 3797.64,4124.45 3797.64,4211.81 D4.1@3801.97,4216.14
NetJ1_A5: J1.A5 R3.2 | length 155.8
  Top Layer w8: J1.A5 1318.9,2588.19 1322.05,2591.34 R3.2
NetJ1_B5: J1.B5 R4.2 | length 165
  Top Layer w8: J1.B5 1430.31,2470.08 1455.51,2495.28 R4.2
NetQ2_3: Q2.3 U4.9 U4.10 | length 327.9
  Top Layer w10: U4.9 U4.10 4849.01,4694.88 4898.23,4744.09 5013.98,4744.09 5051.18,4781.3 Q2.3
NetQ3_2: Q3.2 R31.2
NetR5_1: R5.1 U2.2 | length 580.1
  Top Layer w10: U2.2 5474.88,3986.34 5442.79,3986.34 5413.39,4015.75 5413.39,4114.17 5433.07,4133.86 5728.35,4133.86 5754.41,4107.8 5754.41,4078.27 5766.54,4066.14 R5.1
NetR10_1: R10.1 U4.2 | length 407.6
  Top Layer w10: U4.2 4687.48,4714.69 4670.7,4714.69 4660.06,4725.33 4660.06,4737.94 4645.67,4752.33 4645.67,4836.66 4651.53,4842.52 R10.1
NetR19_1: R19.1 U6.2 | length 400.5
  Top Layer w10: U6.2 5809.53,4754.06 5777.44,4754.06 5767.72,4763.78 5767.72,4842.52 5787.4,4862.2 5994.09,4862.2 6022.44,4833.86 R19.1
PRB1: J3.1 P7.2 | length 527.1
  Top Layer w30: P7.2 5722.44,1222.44 J3.1
PRB2: J5.1 P11.2 | length 545.2
  Top Layer w30: P11.2 4547.64,1222.44 J5.1
PRB3: J6.1 P13.2 | length 545.2
  Top Layer w30: P13.2 3366.54,1222.44 J6.1
PRB4: J7.1 P15.2 | length 572.3
  Top Layer w20: P15.2 2150.16,1236.5
  Top Layer w30: 2150.16,1236.5 J7.1
PRB_GND_1: J3.2 J3.3 J3.4 J3.5 P7.3 | length 909.2
  Top Layer w30: P7.3 5749.59,1141.73 5770.26,1121.06 J3.2 J3.4 J3.5
PRB_GND_2: J5.2 J5.3 J5.4 J5.5 P11.3 | length 927.3
  Top Layer w30: P11.3 4574.79,1141.73 4595.46,1121.06 J5.3 J5.2 J5.4 J5.5
PRB_GND_3: J6.2 J6.3 J6.4 J6.5 P13.3 | length 927.3
  Top Layer w30: P13.3 3393.69,1141.73 3414.36,1121.06 J6.3 J6.2 J6.4 J6.5
PRB_GND_4: J7.2 J7.3 J7.4 J7.5 P15.3 | length 942.7
  Top Layer w15: P15.3 P15.3@2158.7,1138.42 ; J7.3@2483.78,1138.42 J7.3
  Top Layer w20: P15.3@2158.7,1138.42 J7.3@2483.78,1138.42
  Top Layer w30: J7.3 J7.2 J7.4 J7.5
PWM0: P4.4 U1.66
PWM1: P5.4 U1.68
PWM2: U1.70
PWM3: U1.72
Pwr_Button_Board_Side: D1.1 P2.2 R9.2 | length 922.4
  Top Layer w30: P2.2 6318.9,3070.87 6445.91,2943.86 6445.91,2915.51 R9.2 6448.03,2912.2 6454.72,2905.51 D1.1
Reset: C4.2 MD1.5 R1.1 S1.1 U1.34 | length 4829.2
  Top Layer w6: R1.1 1379.13,1747.24 1393.26,1761.37 1393.26,1786.96 2244.09,2637.8 2244.09,2874.02 2362.06,2991.98 2362.06,3001.24 2367.85,3007.03 2372.19,3007.03 2376.97,3011.81 3543.31,3011.81 3799.21,3267.72 4918.5,3267.72 5000,3349.21 MD1.5
  Top Layer w8: S1.1@1043.31,1771.65 1240.16,1771.65 1240.16,1765.75 1258.66,1747.24 C4.2 R1.1
SCK: J2.5 U1.54 | length 1489.6
  Top Layer w6: U1.54 v1(2480.32,3208.66)
  Bottom Layer w6: J2.5 2206.3,2954.33 2452.43,3200.46 2472.12,3200.46 v1(2480.32,3208.66)
SCL: P8.3 U1.22 U10.6 U12.6 U14.6 U16.6 | length 10859.2
  Top Layer w12: U1.22 2425.99,2893.7 2477.78,2945.49 2512.41,2945.49 v1(2519.68,2952.76) ; U16.6 2850.59,1807.28 2874.02,1830.71 2874.02,2512.66 2881.05,2519.68 3858.27,2519.68 ; U14.6 4037.63,1807.28 4074.8,1844.46 v1(4074.8,2519.68) ; U12.6 5218.73,1807.28 5242.98,1831.53 5242.98,2255.49 5114.52,2383.95 4210.54,2383.95 v1(4074.8,2519.68) ; U10.6 6282.49,1807.28 6258.24,1783.04 6258.24,1740.07 6265.27,1733.04 6777.92,1733.04 P8.3 6090.55,2637.8 3924.05,2637.8 3858.27,2572.01 3858.27,2519.68 ; 3858.27,2519.68 v1(4074.8,2519.68)
  Bottom Layer w12: v1(2519.68,2952.76) 4015.75,2952.76 4074.8,2893.7 v1(4074.8,2519.68)
SDA: P8.2 U1.20 U10.5 U12.5 U14.5 U16.5 | length 6252.2
  Top Layer w12: U1.20 2401.67,2874.11 2441.04,2874.11 2480.32,2913.39 v1(2578.74,2913.39) ; v1(3996.06,2598.43) 4094.49,2598.43 4271.65,2421.26 5102.66,2421.26 ; U12.5 5218.73,1757.28 5260.98,1799.53 5260.98,2262.94 5102.66,2421.26 ; U10.5 6737.6,1757.28 6782.72,1802.41 6782.72,1837.84 P8.2 6786.61,1914.17 6279.53,2421.26 5102.66,2421.26
  Bottom Layer w12: v1(2578.74,2913.39) 3779.53,2913.39 3992.43,2700.48 3992.43,2602.06 v1(3996.06,2598.43)
Solar_Converter: C23.2 P3.1 R18.1 U5.2 | length 434.8
  Top Layer w15: R18.1@7112.6,2992.13 R18.1@7112.6,3021.06
  Top Layer w17.5: U5.2 7040.35,3136.81 7102.7,3074.46 7102.7,3030.96 7112.6,3021.06 R18.1@7112.6,2992.13
TEMP_PRB: J4.1 P10.2 | length 569.7
  Top Layer w30: P10.2 6867.32,1222.44 J4.1
TEMP_PRB_GND: J4.2 J4.3 J4.4 J4.5 P10.3 | length 951.7
  Top Layer w30: P10.3 6894.48,1141.73 6915.14,1121.06 J4.3 J4.2 J4.4 J4.5
VBAT: C13.2 C14.2 C15.2 C21.2 C22.2 C29.2 C30.2 C31.2 C32.2 C33.2 D2.2 D3.2 D4.2 P2.1 P4.1 P4.2 P5.1 P5.2 Q2.1 R8.2 R14.2 R23.1 R24.1 R25.1 U2.3 U2.9 U2.10 U3.2 U4.3 U6.3 U6.9 U6.10 U7.5 U8.5 U9.5 | length 9833.5
  Top Layer w10: v1(4624.32,4721.04) 4628.57,4721.04 4654.73,4694.88 U4.3 ; v1(5748.03,4724.41) 5758.86,4724.41 5768.7,4734.25 U6.3 ; v1(5944.88,4625.98) 5952.54,4633.64 5969.07,4633.64 6016.54,4681.1 C29.2
  Top Layer w17.5: U3.2 6809.16,3392.83 6899.2,3392.83 6909.45,3403.08 6909.45,3556.69 R8.2
  Top Layer w20: P2.1 6417.05,3661.69 6515.75,3562.99 R8.2 R8.2@6883.88,3582.26 ; R14.2 6841.73,3679.92 R14.2@6848.86,3672.8 ; C15.2@6957.48,3679.92 C15.2
  Top Layer w30: D2.2 D2.2@1788.58,4174.8 ; U7.5 1790.24,4083.46 1788.58,4085.12 D2.2@1788.58,4174.8 ; R23.1 C31.2 ; U8.5 2857.52,4122.83 2855.91,4124.45 D3.2@2855.91,4211.81 ; R24.1 C32.2 ; U9.5 3920.51,4122.83 3918.9,4124.45 D4.2@3918.9,4211.81 ; R25.1 C33.2 4052.99,4192.68 3947.08,4192.68 3935,4204.76 3925.94,4204.76 D4.2@3918.9,4211.81 ; v1(4862.2,4645.67) 4867.62,4645.67 4896.2,4674.25 4914.41,4674.25 C21.2 C22.2 5026.78,4681.1 5108.23,4762.56 5142.48,4762.56 Q2.1 5145.67,4559.05 5492.13,4212.6 6200.79,4212.6 ; 5590.55,3956.69 5638.58,3956.69 5681.89,3913.39 C14.2 C13.2 5901.57,3913.39 6200.79,4212.6 ; 5925.2,4724.41 5973.23,4724.41 C29.2@6016.54,4681.1 ; C29.2 C30.2 6497.64,4681.1 6521.26,4704.72 6870.08,4704.72 ; P2.1 6542.41,3885.21 6692.29,3885.21 P4.2 ; 6870.08,4212.6 6200.79,4212.6 ; D2.2@1788.58,4174.8 1812.2,4151.18 C31.2 ; C31.2 2477.95,4151.18 2608.4,4281.63 2804.2,4281.63 2851.57,4234.25 D3.2 2855.91,4220.86 D3.2@2855.91,4211.81 ; D3.2@2855.91,4211.81 2877.16,4190.55 C32.2 ; C32.2 3580.32,4190.55 3681.1,4291.34 3854.85,4291.34 3900.56,4245.63 3903.19,4245.63 3914.57,4234.25 D4.2 3918.9,4220.86 D4.2@3918.9,4211.81
  Bottom Layer w10: v1(4624.32,4721.04) 4624.32,4568.59 4661.98,4530.93 4747.46,4530.93 v1(4862.2,4645.67) ; v1(5748.03,4724.41) 5846.46,4724.41 v1(5944.88,4625.98)
VUSB: C6.2 J1.A4_B9 J1.B4_A9 U1.16 | length 1715.4
  Top Layer w6: J1.A4_B9 1334.25,2633.46 v1(1377.95,2677.17) ; v1(2327.19,2830.29) 2329.37,2832.47 2399.4,2832.47 U1.16
  Top Layer w8: J1.A4_B9 1298.66,2629.96 1189.02,2629.96 1141.73,2582.68 1141.73,2503.94 1197.68,2447.99 1298.66,2447.99 J1.B4_A9 1348.82,2444.49 1376.77,2416.54 C6.2
  Bottom Layer w6: v1(1377.95,2677.17) 2106.3,2677.17 2259.42,2830.29 v1(2327.19,2830.29)
pads on no net: J1. J1.A8 J1.B8 J2.1 J2.8 J2.9 J2.P1 J2.P2 J2.P3 J2.P4 MD1.4 MD1.6 MD1.7 MD1.8 MD1.9 MD1.11 MD1.12 MD1.13 MD1.15 MD1.16 MD1.17 MD1.18 MD1.19 MD1.20 P1.MECH P3.MECH P4. P5. U1. U1.14 U1.17 U1.18 U1.19 U1.23 U1.44 U1.46 U1.47 U1.51 U1.53 U1.55 U1.57 U1.58 U1.59 U1.60 U1.67 U1.69 U1.71 U1.73 U1.74 U1.75 U1.Mech U3.3 U3.5 U3.7 U5.3 U5.5 U5.7 U10.2 U10.4 U10.8 U10.10 U10.13 U10.15 U12.2 U12.4 U12.8 U12.10 U12.13 U12.15 U14.2 U14.4 U14.8 U14.10 U14.13 U14.15 U16.2 U16.4 U16.8 U16.10 U16.13 U16.15

## Polygon pours and split planes (outlines as drawn)
GND on Top Layer "NONET_L01_P011" (hatched 45Degree grid 20 track 10, remove dead copper, shelved, pour order 11): 1653.54,1456.69 1653.54,964.57 984.25,964.57 984.25,5000 7755.91,5000 7755.91,1456.69
ISO_GND_4 on Top Layer "NONET_L01_P000" (solid, remove dead copper, shelved, pour order 0): 2401.57,1476.38 2598.43,1476.38 2598.43,1633.86 2598.43,2460.63 1791.34,2460.63 1791.34,964.57 2401.57,964.57
VBAT on Top Layer "NONET_L01_P009" (solid, shelved, pour order 9): 6988.19,3385.83 6850.39,3385.83 6850.39,3425.2 6889.76,3425.2 6889.76,3484.25 6850.39,3484.25 6811.02,3523.62 6811.02,4881.89 6830.71,4901.57 6988.19,4901.57
Battery_GND on Top Layer "NONET_L01_P008" (solid, shelved, pour order 8): 7165.35,3661.42 7165.35,3877.95 7755.91,3877.95 7755.91,2283.46 6751.97,2283.46 6751.97,2874.02 7421.26,2874.02 7421.26,3661.42
Battery_VCC on Top Layer "NONET_L01_P007" (solid, shelved, pour order 7): 7007.87,3700.79 7007.87,3346.46 7381.89,3346.46 7381.89,3661.42 7125.98,3661.42 7086.61,3700.79
Solar_Converter on Top Layer "NONET_L01_P005" (solid, shelved, pour order 5): 7381.89,3149.61 7007.87,3149.61 7007.87,2874.02 7204.72,2874.02 7381.89,2874.02
ISO_GND_1 on Top Layer "NONET_L01_P003" (solid, remove dead copper, shelved, pour order 3): 5950.43,1478.66 6147.28,1478.66 6147.28,1636.14 6147.28,2462.91 5340.2,2462.91 5340.2,966.85 5950.43,966.85
ISO_GND_2 on Top Layer "NONET_L01_P002" (solid, remove dead copper, shelved, pour order 2): 4793.31,1476.38 4990.16,1476.38 4990.16,1633.86 4990.16,2460.63 4183.07,2460.63 4183.07,964.57 4793.31,964.57
ISO_GND_3 on Top Layer "NONET_L01_P001" (solid, shelved, pour order 1): 3612.2,1476.38 3809.06,1476.38 3809.06,1633.86 3809.06,2460.63 3001.97,2460.63 3001.97,964.57 3612.2,964.57
GND on Bottom Layer "NONET_L02_P013" (hatched 45Degree grid 20 track 10, shelved, pour order 13): 984.25,5000 7755.91,5000 7755.91,1456.69 7736.22,1476.38 984.25,1476.38

## Silkscreen, mask and mechanical layers (free items; w line width, h text height)
Top Overlay:
  lines w10: 1811.02,1091.53 2361.02,1091.53 2361.02,1891.53 1811.02,1891.53 1811.02,1091.53 ; 3031.5,1091.53 3581.5,1091.53 3581.5,1891.53 3031.5,1891.53 3031.5,1091.53 ; 4212.6,1091.53 4762.6,1091.53 4762.6,1891.53 4212.6,1891.53 4212.6,1091.53 ; 4271.65,4251.97 5255.91,4251.97 5255.91,4960.63 4271.65,4960.63 4271.65,4251.97 ; 5059.06,3484.25 6043.31,3484.25 6043.31,4192.91 5059.06,4192.91 5059.06,3484.25 ; 5370.16,1091.53 5920.16,1091.53 5920.16,1891.53 5370.16,1891.53 5370.16,1091.53 ; 5393.7,4251.97 6377.95,4251.97 6377.95,4960.63 5393.7,4960.63 5393.7,4251.97 ; 6535.43,1091.53 7085.43,1091.53 7085.43,1891.53 6535.43,1891.53 6535.43,1091.53
  text "3V3 Sensors" at 4325.21,4291.34 h40
  text "3V8 General" at 5451.21,4291.34 h40
  text "3V3 General" at 5116.57,3523.62 h40
  text "Isolated Sensor" at 1844.09,1417.32 h60
  text "Isolated Sensor" at 3064.57,1417.32 h60
  text "Isolated Sensor" at 4237.27,1417.32 h60
  text "Isolated Sensor" at 5387.01,1417.32 h60
  text "Temp Sensor ONLY" at 6560.11,1377.95 h60

## Text inside footprints (layer, text, board x,y; h text height)
J1: Mechanical 13 "PCB EDGE" at 1016.53,2326.38 h16 r270